# Altium PCB Rotary_Encoder_Square_Edge.PcbDoc
Units mm, origin at the board's own origin, x right, y up, seen from the top; angles counter-clockwise.
Board outline 19.5 x 19.5 mm, 2 copper layers (Top Layer, Bottom Layer), stack 0.97 mm thick; 20 components, 12 nets, 56 pads, 42 vias.
Unrouted connection lines stored in the file: 1.
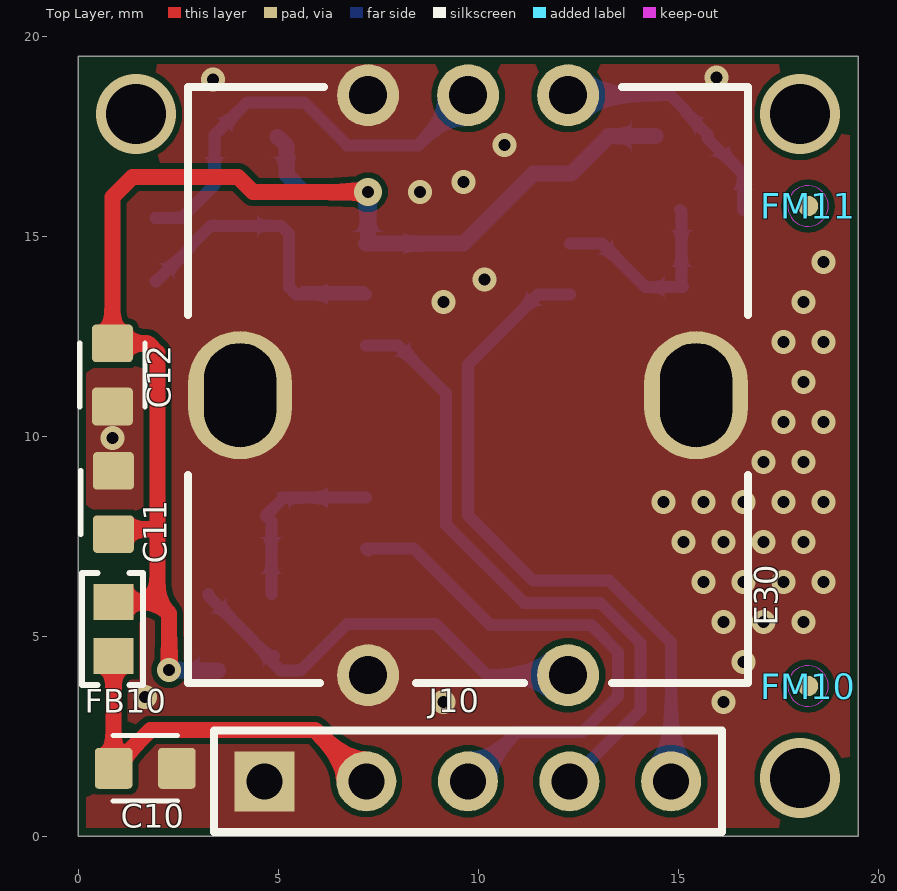
[diagram p0: Top Layer view]
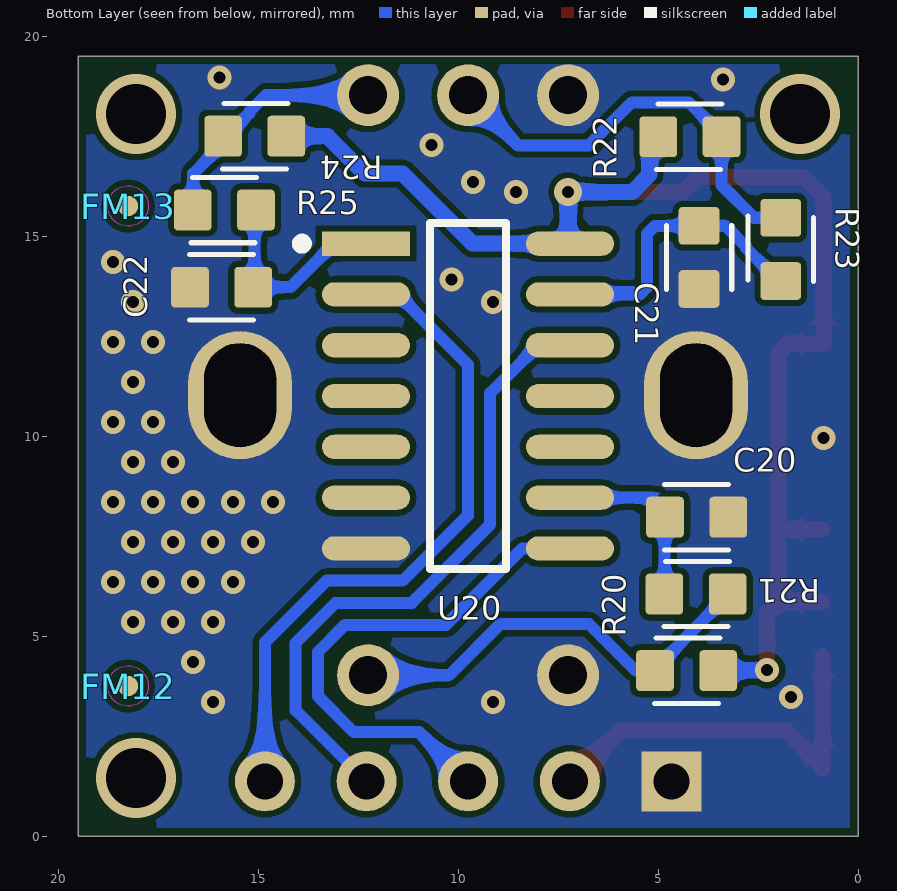
[diagram p1: Bottom Layer view, seen from below]
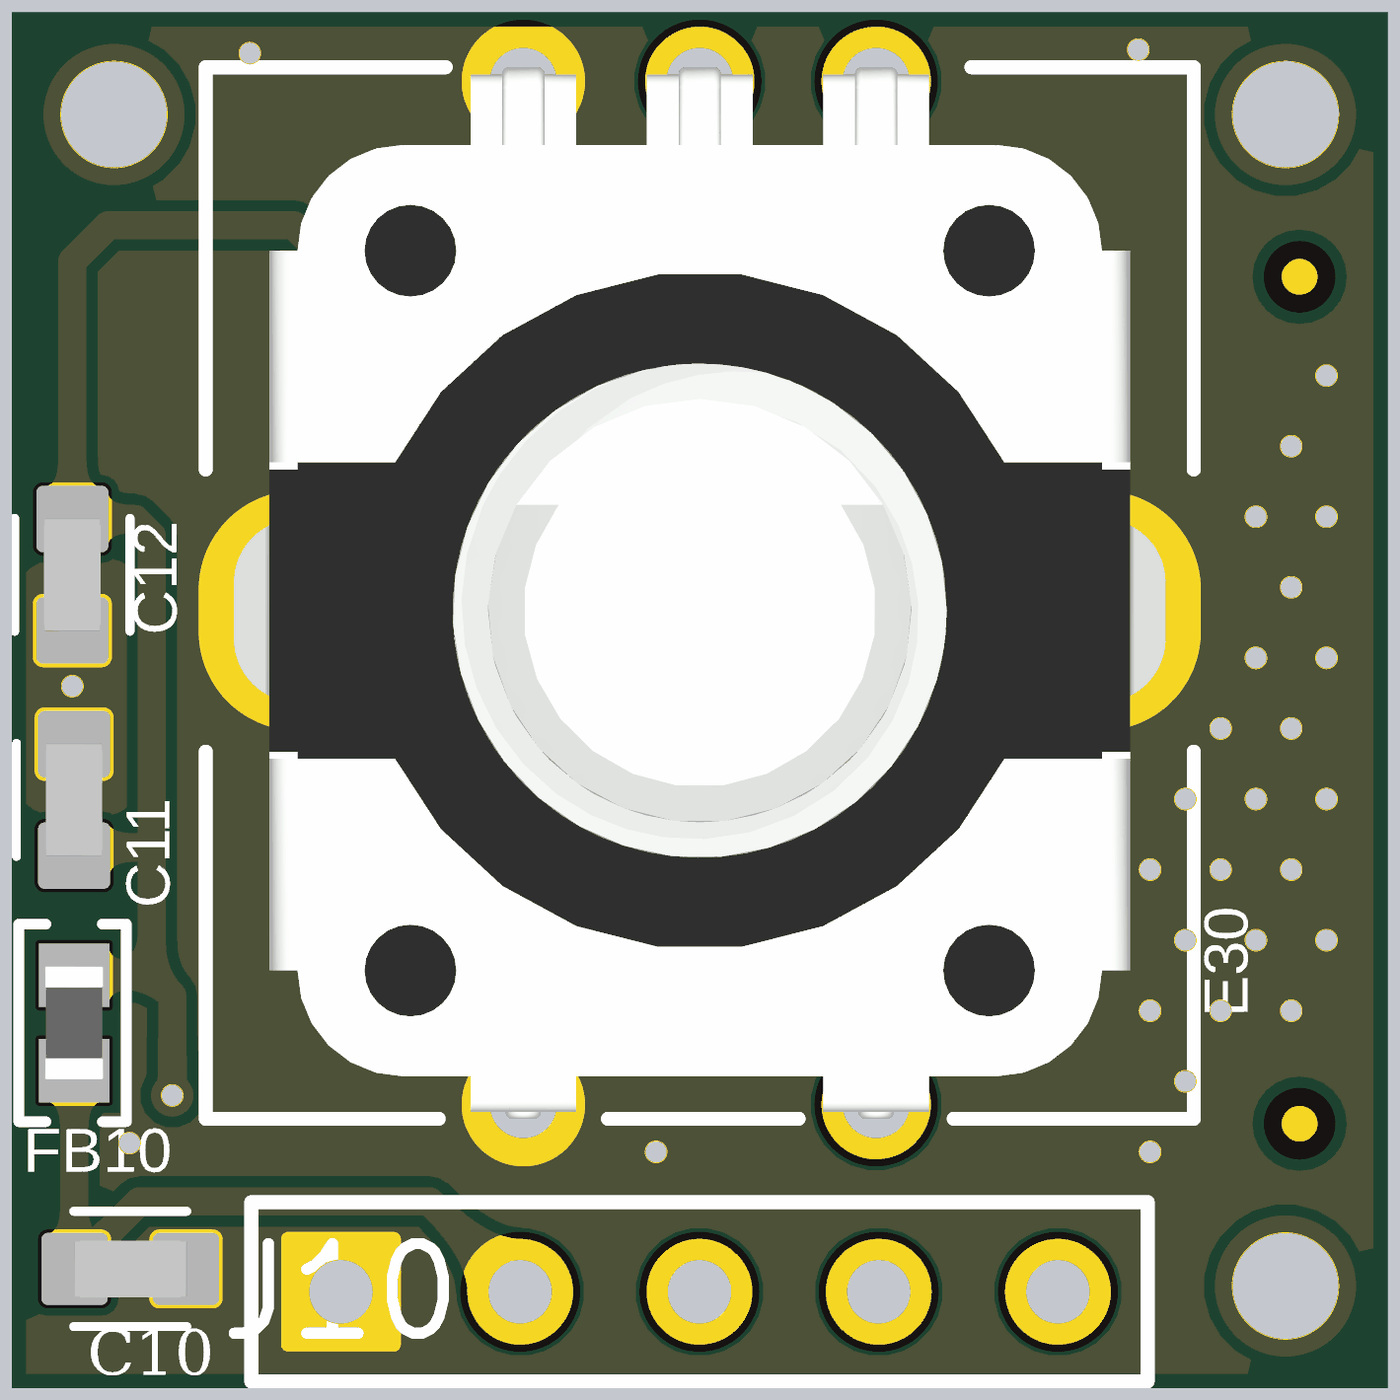
[diagram p2: 3D render of the assembled board from above, using the file's embedded part models]
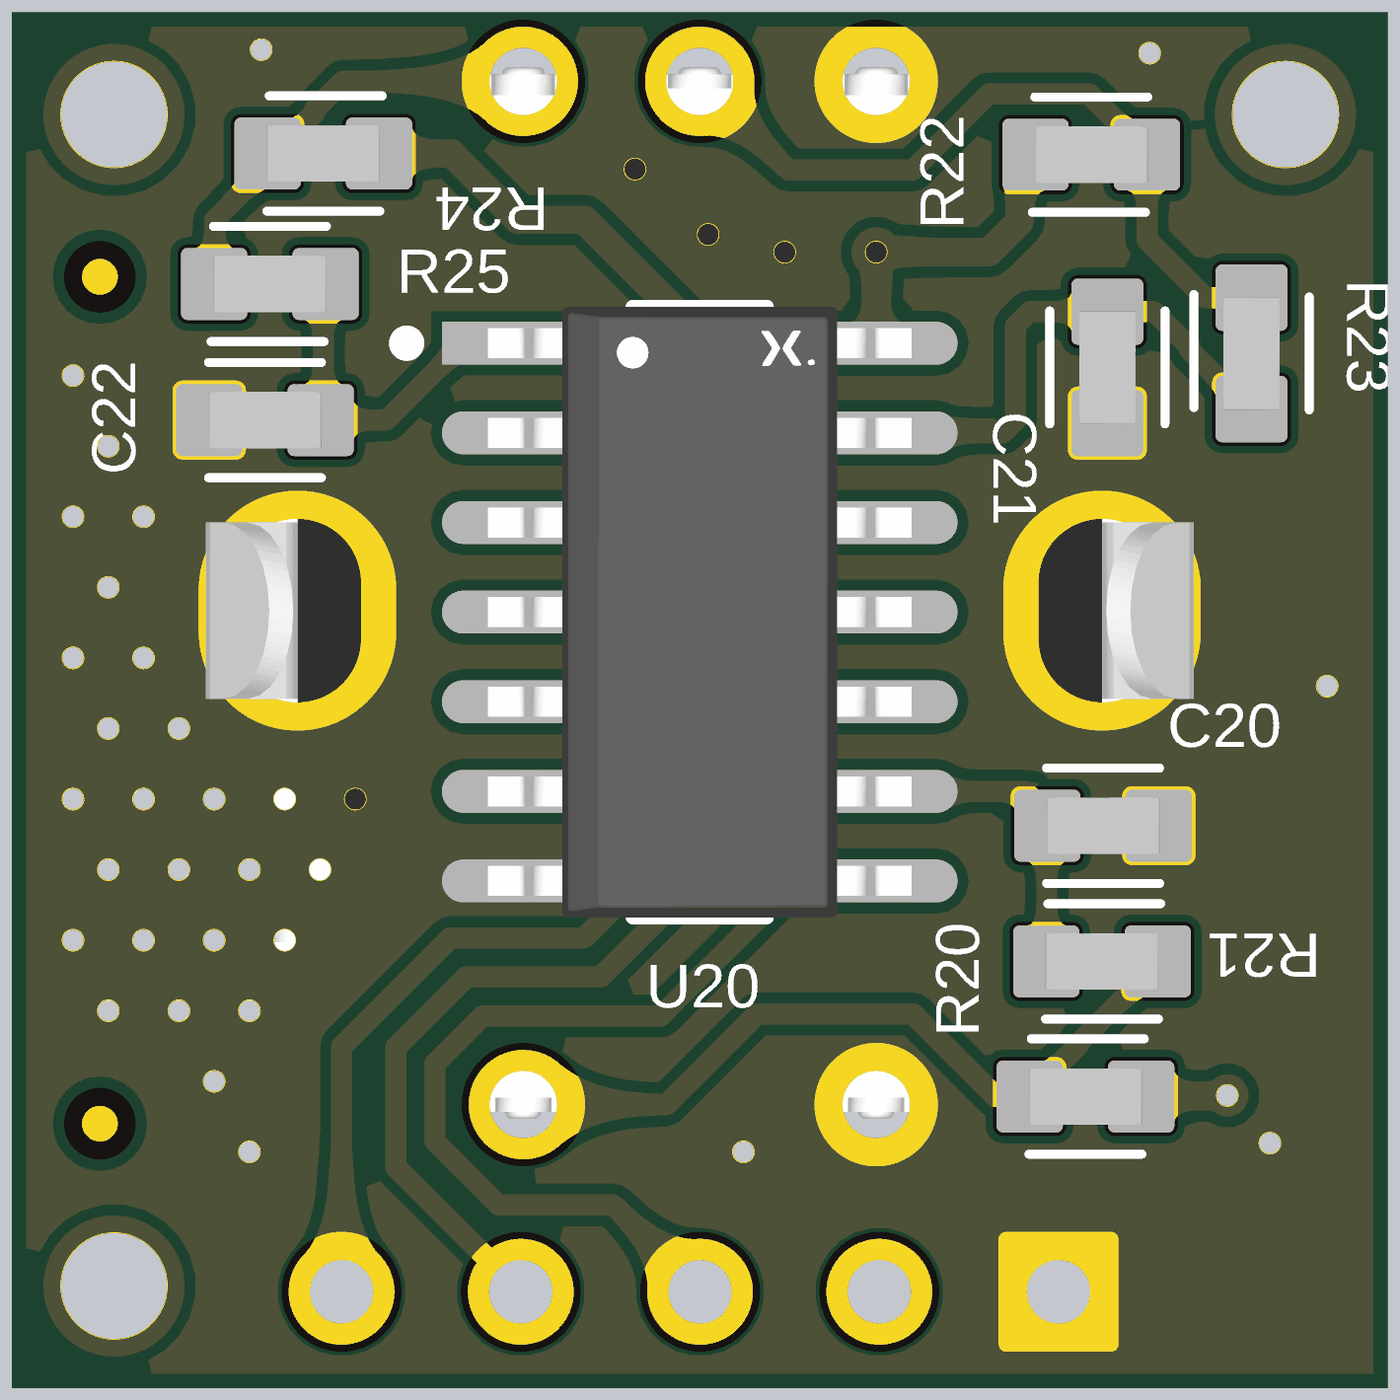
[diagram p3: 3D render of the assembled board from below, using the file's embedded part models]

## Layer stack, top to bottom
Top Solder: solder mask 0.0127, Solder Resist, Dk 3.8
Top Layer: signal copper 0.035
Dielectric: core 0.9, FR-4, Dk 4.5
Bottom Layer: signal copper 0.035
Bottom Solder: solder mask 0.0127, Solder Resist, Dk 3.8

## Board outline
0,0 0,19.5 19.5,19.5 19.5,0

## Design rules (kind name [scope] priority, off if disabled: settings)
BoardOutlineClearance [All] p1: gap=0.2 ignorepadtopadclearanceinfootprint=FALSE
Clearance [All] p1: gap=0.15 ignorepadtopadclearanceinfootprint=FALSE except(0.254: Arc-Hole Track-Hole SMDPad-Hole THPad-Hole Via-Hole Fill-Hole Poly-Hole Region-Hole Text-Hole)
ComponentClearance [All] p1: gap=0.127 collisioncheckmode=3 verticalgap=0.127 showdistances=TRUE
DiffPairsRouting [All] p1: maxlimit=0.254 minlimit=0.127 mostfreqgap=0.127 toplayer_minwidth=0.127 toplayer_maxwidth=25.4 toplayer_prefwidth=0.127 bottomlayer_minwidth=0.127 bottomlayer_maxwidth=25.4 bottomlayer_prefwidth=0.127 maxuncoupledlength=12.7
Height [All] p1: minheight=0 maxheight=1816.048 prefheight=12.7
HoleSize [All] p1: absolutevalues=TRUE maxlimit=6.3 minlimit=0.3 maxpercent=80.000 minpercent=20.000
HoleToHoleClearance [All] p1: gap=0.25 allowstackedmicrovias=FALSE
MinimumAnnularRing [All] p1: minimumring=0.1
PlaneClearance [All] p1: clearance=0.254
PlaneConnect PlaneConnectPowerPads [InPadClass('PowerPads')] p1: planeconnectstyle=Direct reliefexpansion=0.508 reliefentries=4 reliefconductorwidth=0.254 reliefairgap=0.254
PlaneConnect [All] p2: pad.planeconnectstyle=Relief pad.reliefexpansion=0.3 pad.reliefentries=4 pad.reliefconductorwidth=0.127 pad.reliefairgap=0.127 via.planeconnectstyle=Direct via.reliefexpansion=0.3 via.reliefentries=4 via.reliefconductorwidth=0.127 via.reliefairgap=0.127
PolygonConnect PolygonConnectPowerPads [All vs (InPadClass('PowerPads'))] p1: connectstyle=Direct reliefconductorwidth=0.254 reliefentries=4 polygonreliefangle="90 Angle" airgapwidth=0.254
PolygonConnect [All] p2: connectstyle=Direct reliefconductorwidth=0.127 reliefentries=4 polygonreliefangle="90 Angle" airgapwidth=0.127
RoomDefinition U_3_Rotary_Encoder_Encoder [InComponentClass('U_3_Rotary_Encoder_Encoder')] p1: confinementstyle=ConfineIn formatcopy=TRUE lockcomponents=FALSE outline -9.731,-2.398 41.069,-2.398 41.069,23.002 -9.731,23.002
RoomDefinition U_2_Rotary_Encoder_IC [InComponentClass('U_2_Rotary_Encoder_IC')] p2: confinementstyle=ConfineIn formatcopy=TRUE lockcomponents=FALSE outline -0.618,-0.596 20.298,-0.596 20.298,20.442 -0.618,20.442
RoomDefinition U_1_Rotary_Encoder_Input_output [InComponentClass('U_1_Rotary_Encoder_Input_output')] p3: confinementstyle=ConfineIn formatcopy=TRUE lockcomponents=FALSE outline -1.253,-1.721 20.706,-1.721 20.706,21.681 -1.253,21.681
RoutingVias [All] p1: holewidth=0.3 width=0.6 viastyle="Through Hole" minholewidth=0.3 minwidth=0.6 maxholewidth=0.6 maxwidth=6.6
SilkToSilkClearance [All] p1: silktosilkclearance=0.1
SilkToSolderMaskClearance [IsPad] p1: minsilkscreentomaskgap=0.15 clearancetoexposedcopper=TRUE
SolderMaskExpansion [All] p1: expansion=0.1 istentingtop=FALSE
Width VCC [InNetClass('VCC')] p1: maxlimit=0.75 minlimit=0.3 preferedwidth=0.4
Width VCC-IN [InNetClass('VCC_IN')] p2: maxlimit=0.75 minlimit=0.3 preferedwidth=0.4
Width GND [InNetClass('GND')] p3: maxlimit=0.75 minlimit=0.3 preferedwidth=0.4
Width Signal [InNetClass('Signal')] p4: maxlimit=0.3 minlimit=0.3 preferedwidth=0.3
Width Signal_1 [InNetClass('Signal_1')] p5: maxlimit=0.3 minlimit=0.3 preferedwidth=0.3
Width Signal_2 [InNetClass('Signal_2')] p6: maxlimit=0.3 minlimit=0.3 preferedwidth=0.3
21 further rules are at their usual default settings.

## Classes and differential pairs
net class Power: VCC VCC_IN
component class U_3_Rotary_Encoder_Encoder: E30
component class U_2_Rotary_Encoder_IC: C20 C21 C22 R20 R21 R22 R23 R24 R25 U20
component class U_1_Rotary_Encoder_Input_output: C10 C11 C12 FB10 FM10 FM11 FM12 FM13 J10
net class Signal: A B E1-PIN-1 E1-PIN-A E1-PIN-B IC-U1-Pin1 IC-U1-Pin3 IC-U1-Pin5 SW
net class GND: GND

## Components (designator, comment, footprint, x,y, rotation, side; value= is the part's Value field where it differs from the comment)
C10 "100 nF" C-0603 1.68,1.692 r180 top
C11 "100 nF" C-0603 0.885,8.338 r270 top
C12 "330 nF" C-0603 0.86,11.528 r90 top
C20 "10 nF" C-0603 4.035,7.972 r0 bottom
C21 "10 nF" C-0603 3.974,14.466 r90 bottom
C22 "10 nF" C-0603 15.911,13.72 r180 bottom
E30 "PEC11R-4315F-S0012" "BOURNS PEC11R-4315F-S0012" 9.75,11.02 r180 top locked
FB10 "120 Ohms @ 100 MHz" "FER 0603_1608" 0.885,5.178 r90 top
FM10 "FM" Fiducial_Marker_1mm 18.25,3.75 r0 top
FM11 "FM" Fiducial_Marker_1mm 18.25,15.75 r0 top
FM12 "FM" Fiducial_Marker_1mm 18.25,3.75 r180 bottom
FM13 "FM" Fiducial_Marker_1mm 18.25,15.75 r180 bottom
J10 "Header 5" HDR1X5 4.666,1.368 r0 top
R20 "10 kOhms" R-0603 4.285,4.135 r180 bottom value=10K
R21 "10 kOhms" R-0603 4.05,6.05 r180 bottom value=10K
R22 "10 kOhms" R-0603 4.203,17.481 r0 bottom value=10K
R23 "10 kOhms" R-0603 1.931,14.665 r90 bottom value=10K
R24 "10 kOhms" R-0603 15.084,17.497 r180 bottom value=10K
R25 "10 kOhms" R-0603 15.842,15.649 r0 bottom value=10K
U20 "HEF40106BT,653" FP-SOT108-1-IPC_A 9.75,10.999 r180 bottom locked

## Footprints (in the part's own frame and the unit in brackets; to place one, negate y for a bottom-side part, rotate by r counter-clockwise, add the part's x,y. Pads: shape width x height; smd on the part's side, far side on the other; paste and mask are expansions set on the pad)
"BOURNS PEC11R-4315F-S0012" [mm] "Rotary Encoder Mechanical 12 Quadrature (Incremental) Vertical, 12.5x13.4mm Body"
  round 1.55 hole 0.95: 1(-2.5,7) 2(2.5,7) A(-2.5,-7.5) B(0,-7.5) C(2.5,-7.5)
  oval 2.6x3.2 hole 2.6 slot 1.8 at 0 deg: S(-5.7,0) S(5.7,0)
  silkscreen extent -7,-7.7 7,7.2, body extent -7,-7.7 7,7.2, height 22.1
C-0603 [mm]
  rrect20% 0.94x1.02 smd mask+0.05: 1(-0.79,0) 2(0.79,0)
  silkscreen extent -0.8,-0.82 0.8,0.82, body extent -0.8,-0.4 0.8,0.4, height 0.23
"FER 0603_1608" [mm] "Chip Ferrite, 2-Leads, Body 1.60x0.80mm, IPC Medium Density"
  rect 0.9x1 smd mask+0.05: 1(-0.675,0) 2(0.675,0)
  silkscreen extent -1.4,-0.74 1.4,0.79, body extent -0.8,-0.41 0.8,0.41, height 0.82
Fiducial_Marker_1mm [mil] "Fiducial Marker"
  round 20 smd paste-40 mask+10: 0(0,0)
  Top Layer keep-out circle w0.39: c0,0 r20
  body extent -10,-10 10,10
FP-SOT108-1-IPC_A [mm]
  rect 2.204x0.608 smd paste+0 mask+0: 1(-2.551,3.81)
  rrect100% 2.204x0.608 smd paste+0 mask+0: 2(-2.551,2.54) 3(-2.551,1.27) 4(-2.551,0) 5(-2.551,-1.27) 6(-2.551,-2.54) 7(-2.551,-3.81) 8(2.551,-3.81) 9(2.551,-2.54) 10(2.551,-1.27) 11(2.551,0) 12(2.551,1.27) 13(2.551,2.54) 14(2.551,3.81)
  silkscreen extent -4.28,-4.33 0.95,4.33, body extent -3,-4.33 3,4.33, height 1.75
HDR1X5 [mm] "Connector; Header; 5 Position"
  rect 1.5x1.5 hole 0.9: 1(0,0)
  round 1.5 hole 0.9: 2(2.54,0) 3(5.08,0) 4(7.62,0) 5(10.16,0)
  silkscreen extent -1.27,-1.27 11.43,1.27
R-0603 [mm]
  rrect20% 0.94x1.02 smd mask+0.05: 1(-0.79,0) 2(0.79,0)
  silkscreen extent -0.8,-0.82 0.83,0.82, body extent -0.8,-0.4 0.8,0.4, height 0.23

## Part data
C10 C11 C12 C20 C21 C22: library part C-0603, "Ceramic Capacitor 16V 0603 (1608 Metric)", Package="0603 KEMET", Availability=Warning, Check_prices=https://www.snapeda.com/parts/C0603C104J4RAC/KEMET/view-part/1763758/?ref=eda, MF=KEMET, MP=C0603C104J4RAC, price=None, SnapEDA_Link=https://www.snapeda.com/parts/C0603C104J4RAC/KEMET/view-part/1763758/?ref=snap
E30: "ROTARY ENCODER MECHANICAL 12PPR", Capacitance=4315F, manufacturer="Bourns Inc.", Manufacturer 1=Bourns, Max Operating Temperature=70°C, Min Operating Temperature=-30°C, Package Quantity=75, Supplier Part Number 1=PEC11R-4315F-S0012-ND, Actuator Type="6mm Dia Flatted End", Built in Switch=Yes, componentlink1description=Datasheet, componentlink1url=https://www.bourns.com/docs/Product-Datasheets/PEC11R.pdf, componentlink2description="DigiKey Link", componentlink2url=http://digikey.com/product-detail/en/bourns-inc/PEC11R-4315F-S0012/PEC11R-4315F-S0012-ND/4699232, Detent=Yes, Encoder Type=Mechanical, Height=13.4mm, lastupdated="25-06-2020 15:43:12", Length=21.5mm, Lifecycle Status=Active, Manufacturer Part Number 1=PEC11R-4315F-S0012, Minimum Order=1, Mount="Through Hole,Panel,PCB", Mounting Type="Panel, PCB Through Hole", Number Of Channels=2, Orientation=Vertical, Output Type="Quadrature (Incremental)", packaging=Unknown, Part Number=PEC11R-4315F-S0012, Part Status=Active, price=1.91, Pricing 1="1=1.91000, 10=1.68200, 25=1.50800, 50=1.45000, 100=1.39200, 250=1.33400, 500=1.10200, 1000=1.04400, 5000=0.87000 (USD)", Pulses per Revolution=12, RoHS=Yes, Rotational Life (Cycles Min)=30K, series=PEC11R, Stock 1=453, Supplier 1=DigiKey, Termination="PC Pin", Termination Style="PC Pin", Width=12.5mm
FB10: library part PE-0603PFB121ST, "FERRITE BEAD 120 OHM 0603 1LN", Current Rating (Max)=2A, DC Resistance (DCR) (Max)=50mOhm, Device Package="0603 (1608 Metric)", manufacturer="Pulse Electronics Network", Operating Temperature="-40°C ~ 105°C", Supplier Part Number 1=553-2387-6-ND, componentlink1description=Datasheet, componentlink1url=https://productfinder.pulseeng.com/doc_type/WEB301/doc_num/WC706/doc_part/WC706.pdf, componentlink2description="DigiKey Link", componentlink2url=https://www.digikey.com/en/products/detail/pulse-electronics-network/PE-0603PFB121ST/5050544, Filter Type="Power Line", Height (Max)="0.041\" (1.05mm)", Impedance @ Frequency="120 Ohms @ 100 MHz", lastupdated="19-09-2022 13:44:01", Lifecycle Status=Active, Minimum Order=1, Mounting Type="Surface Mount", Number of Lines=1, Package / Case="0603 (1608 Metric)", packaging=TapeAndReel, Part Number=PE-0603PFB121ST, Part Status=Active, partid=591, price=0.01, series=PFB, Size / Dimension="0.063\" L x 0.032\" W (1.60mm x 0.80mm)", Supplier 1=DigiKey, XjtagCategorisation="Ferrite Bead.pdd"
FM10 FM11 FM12 FM13: library part "Fiducial Marker", "Fiducial Marker"
J10: "Header, 5-Pin", LatestRevisionDate=17-Jul-2002, LatestRevisionNote="Re-released for DXP Platform.", Publisher="Altium Limited"
R20 R21 R22 R23 R24 R25: library part R-0603, "0603", Power_Rating=".1 W", Resistance=10K, Tolerance=1%, Availability=Warning, Check_prices=https://www.snapeda.com/parts/2-1623703-0/TE%20Connectivity/view-part/2213192/?ref=eda, MF="TE Connectivity", MP=2-1623703-0, Package=0603, price=None, SnapEDA_Link=https://www.snapeda.com/parts/2-1623703-0/TE%20Connectivity/view-part/2213192/?ref=snap
  R20 R22 R24: XjtagCategorisation=pull-resistor.pdd
  R21 R23 R25: XjtagCategorisation=resistor.pdd
U20: library part CD4016B, "IC INVERT SCHMITT 6CH 6-INP 14SO", RoHS Compliant=Yes

## Via types
v1: diameter 0.6, hole 0.3, Top Layer to Bottom Layer, tented both sides, 38 vias
v2: diameter 2, hole 1.5, Top Layer to Bottom Layer, 3 vias
v3: diameter 0.7, hole 0.3, Top Layer to Bottom Layer, tented both sides, 1 vias

## Nets (pads, with @x,y where several pads share a name; then routed paths per layer and width w, separated by ;. In a path a pad name is that pad's centre, name@x,y a point inside that pad or via, vN(x,y) a via of type N, cw(c..) or ccw(c..) an arc to the next point about the centre after c; other vN are vias at no path point)
A: J10.5 U20.2 | length 16.9
  Bottom Layer w0.3: U20.2 11.503,13.539 9.75,11.786 9.75,8.017 11.384,6.383 13.287,6.383 14.826,4.844 J10.5
B: J10.4 U20.12 | length 16.1
  Bottom Layer w0.3: U20.12 7.997,12.269 9.196,11.07 9.196,7.787 11.154,5.829 13.057,5.829 14.059,4.827 14.059,3.141 J10.4
E1-PIN-1: E30.1 R20.1 R21.2 | length 11.1
  Bottom Layer w0.3: R21.2 3.26,6.01 4.383,4.887 4.383,4.867 4.755,4.495 4.9,4.495 4.84,4.435 4.775,4.435 R20.1 5.56,4.135 6.73,5.305 8.938,5.305 10.223,4.02 E30.1
E1-PIN-A: E30.A R24.1 R25.2 | length 6.2
  Bottom Layer w0.3: E30.A 14.806,18.52 15.216,18.11 15.216,18.065 15.734,17.547 15.734,17.447 16.623,16.558 16.623,15.658 R25.2
E1-PIN-B: E30.B R22.1 R23.2 | length 10.7
  Bottom Layer w0.3: R23.2 2.591,15.455 3.413,16.276 R22.1 3.413,17.521 4.233,18.341 5.654,18.341 6.73,17.265 8.495,17.265 E30.B
GND: C10.1 C11.1 C12.1 C20.1 C21.1 C22.1 E30.2 E30.C E30.S J10.1 U20.7
  other v1: 9.131,3.35 16.131,3.35 1.671,3.474 16.631,4.35 16.131,5.35 17.131,5.35 18.131,5.35 15.631,6.35 16.631,6.35 17.631,6.35 18.631,6.35 15.131,7.35 16.131,7.35 17.131,7.35 18.131,7.35 14.631,8.35 15.631,8.35 16.631,8.35 17.631,8.35 18.631,8.35 17.131,9.35 18.131,9.35 0.86,9.95 17.631,10.35 18.631,10.35 18.131,11.35 17.631,12.35 18.631,12.35 9.131,13.35 18.131,13.35 10.164,13.919 18.631,14.35 8.546,16.099 9.631,16.35 10.668,17.276 3.375,18.919 15.964,18.969
IC-U1-Pin1: C22.2 R25.1 U20.1 | length 5.2
  Bottom Layer w0.3: U20.1 13.099,14.809 14.188,13.72 C22.2 15.086,13.755 15.086,15.614 R25.1
IC-U1-Pin3: C21.2 R23.1 U20.13 | length 9
  Bottom Layer w0.3: R23.1@1.949,13.857 R23.1 1.971,13.875 2.802,14.707 2.802,14.745 3.314,15.256 C21.2 5.074,15.256 5.279,15.051 5.279,13.715 5.455,13.539 U20.13 7.14,13.598 5.632,13.598
IC-U1-Pin5: C20.2 R21.1 U20.9 | length 4.7
  Bottom Layer w0.3: R21.1 4.833,6.058 4.833,7.88 4.7,8.012 5.147,8.459 U20.9
SW: J10.3 U20.8 | length 13.2
  Bottom Layer w0.3: U20.8@7.25,7.138 U20.8 8.39,7.189 10.304,5.275 12.828,5.275 13.505,4.598 13.505,3.5 12.603,2.598 10.976,2.598 J10.3
VCC: C11.2 C12.2 FB10.2 R20.2 R22.2 R24.2 U20.14 | length 36.1
  Top Layer w0.4: FB10.2 1.985,5.853 ; C11.2@0.885,7.663 1.93,7.663 1.985,7.718 ; v1(2.275,4.15) 2.275,5.563 1.985,5.853 ; v3(7.25,16.1) 4.379,16.1 3.998,16.481 1.368,16.481 0.86,15.973 C12.2 1.751,12.318 1.985,12.084 1.985,7.718 ; 1.985,5.853 1.985,7.718
  Bottom Layer w0.4: v1(2.275,4.15) 2.282,4.143 3.488,4.143 R20.2 ; R22.2 5.218,17.256 5.218,16.532 5.65,16.1 v3(7.25,16.1) 7.25,14.86 U20.14 9.635,14.809 11.384,16.558 12.327,16.558 13.266,17.497 R24.2 R24.2@14.434,17.497
VCC_IN: C10.2 FB10.1 J10.2 | length 10.1
  Top Layer w0.4: FB10.1 0.888,4.5 0.888,1.694 C10.2 0.89,1.732 1.807,2.648 5.926,2.648 J10.2
pads on no net: FM10.0 FM11.0 FM12.0 FM13.0 U20.3 U20.4 U20.5 U20.6 U20.10 U20.11
copper on no net:
  other v2: 18.05,1.45 1.45,18.05 18.05,18.05

## Polygon pours and split planes (outlines as drawn)
GND on Top Layer "GND TOP" (solid, remove dead copper, pour order 2): 0,0 0,19.5 19.5,19.5 19.5,0
GND on Bottom Layer "GND_BOTTOM" (solid, pour order 1): 0,0 0,19.5 19.5,19.5 19.5,0

## Dimensions
0,0 to 0,19.5 on Dimensions
0,19.5 to 19.5,19.5 on Dimensions